# Altium PCB Emergency_v2.0.PcbDoc
Units mil, origin at the board's own origin, x right, y up, seen from the top; angles counter-clockwise.
Board outline 2363.93 x 3184.99 mil, 2 copper layers (Top Layer, Bottom Layer); 11 components, 9 nets, 38 pads, 355 vias.
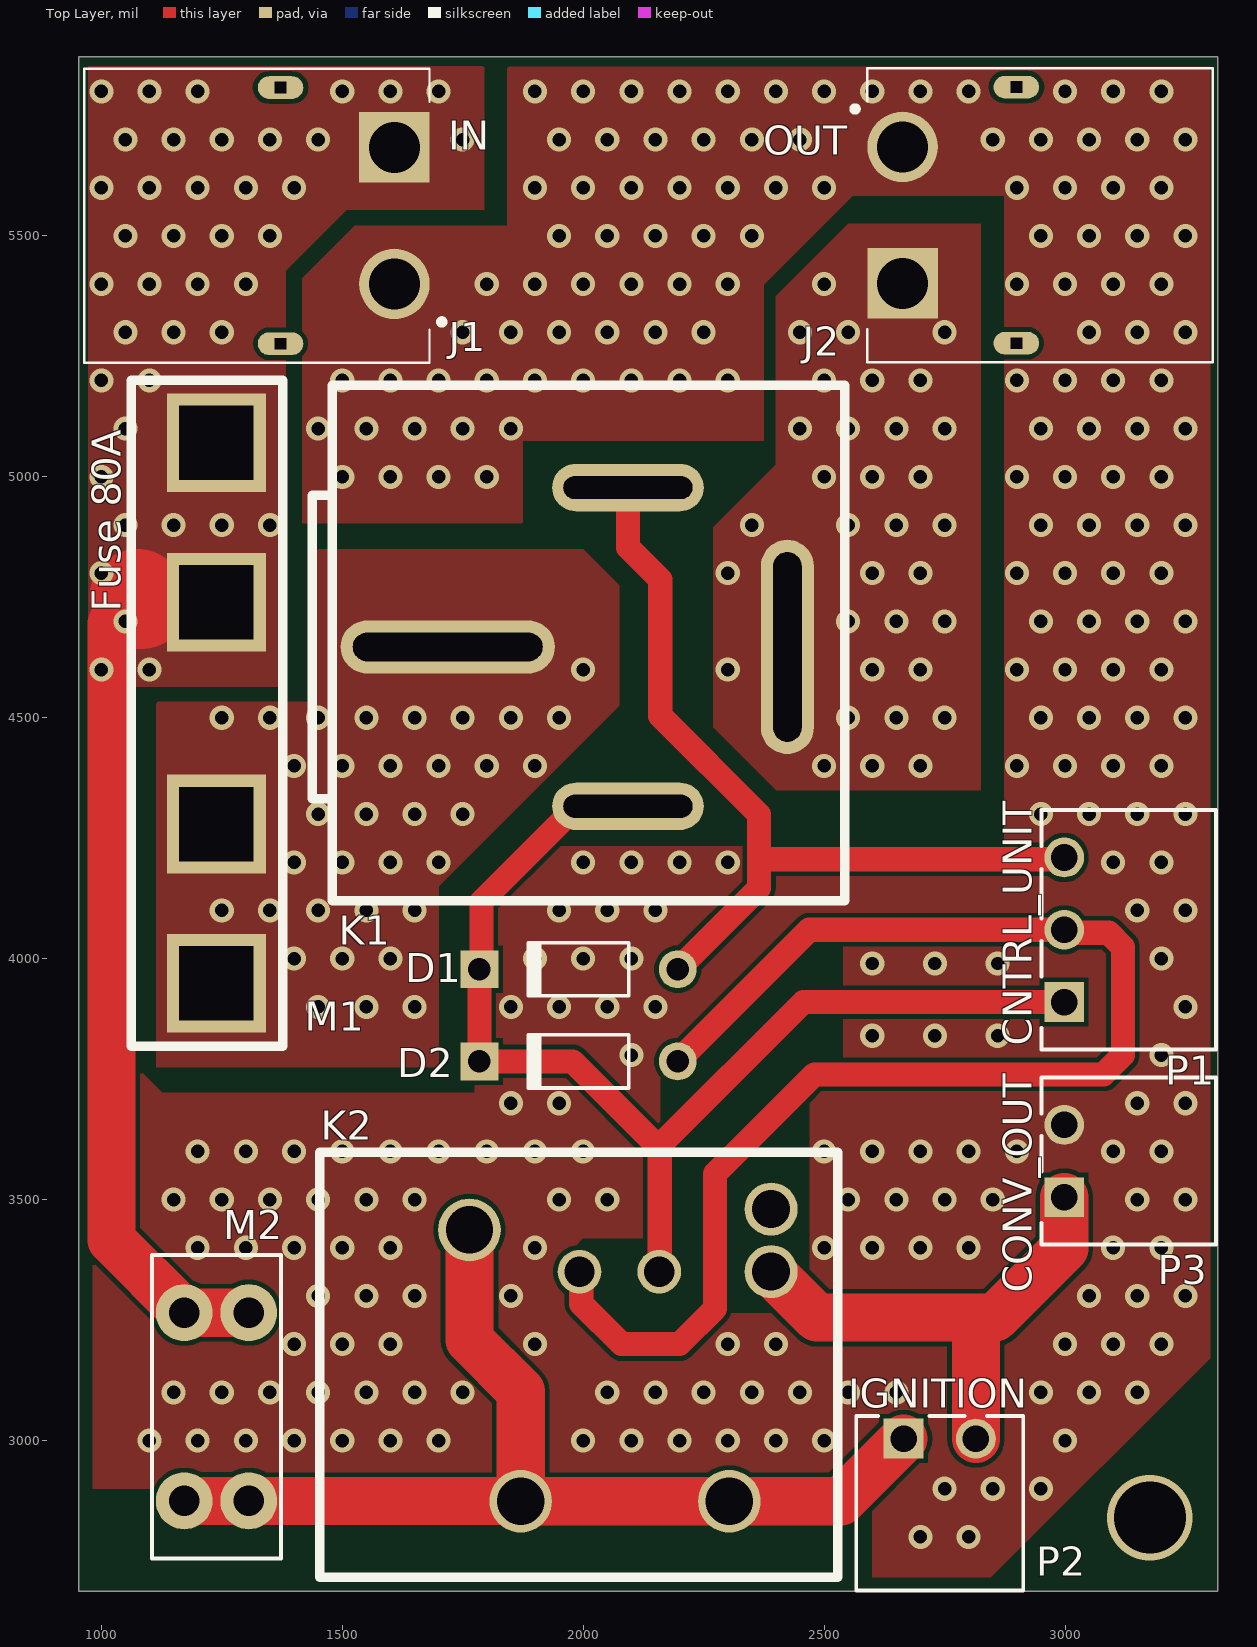
[diagram p0: Top Layer view]
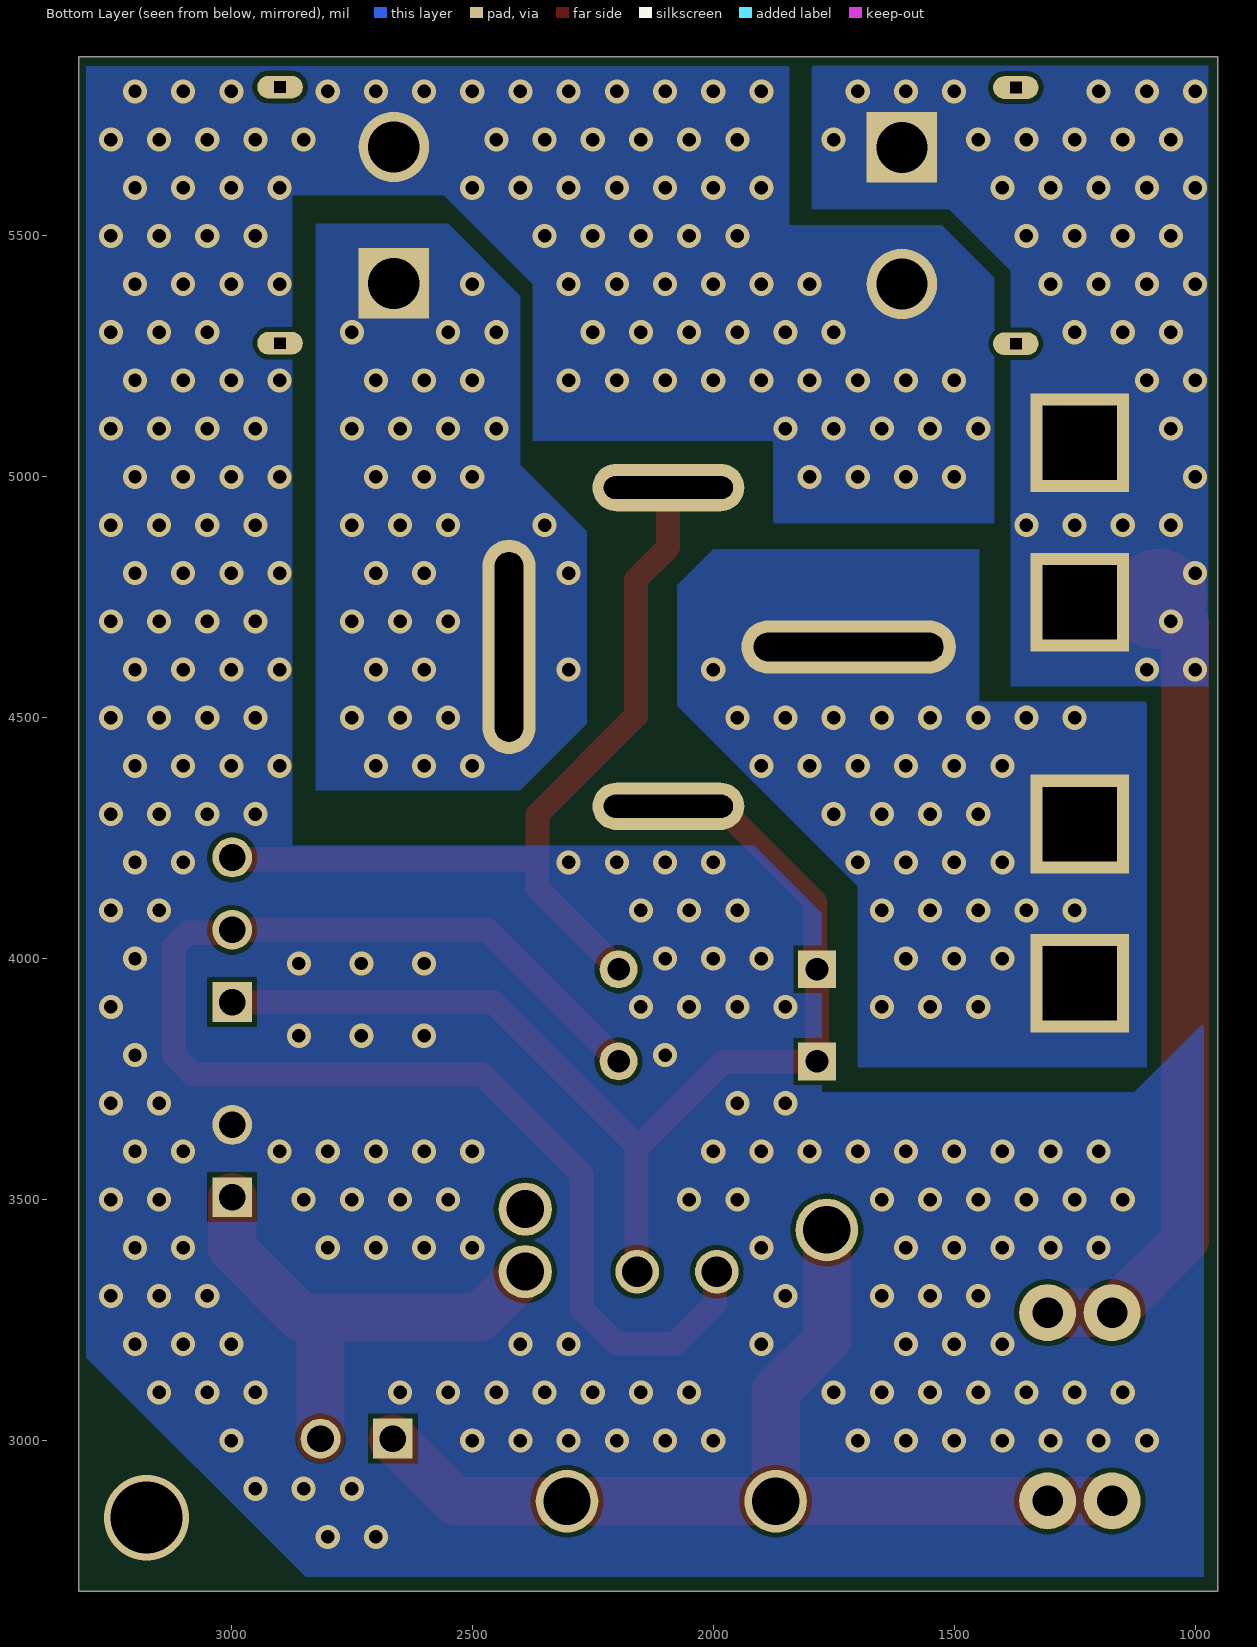
[diagram p1: Bottom Layer view, seen from below]

## Layer stack, top to bottom
Top Solder: solder mask 0.4, Solder Resist, Dk 3.5
Top Layer: signal copper 1.4
Dielectric 1: dielectric 12.6, FR-4, Dk 4.8
Bottom Layer: signal copper 1.4
Bottom Solder: solder mask 0.4, Solder Resist, Dk 3.5

## Board outline
953,2687.01 953,5872 3316.93,5872 3316.93,2687.01

## Design rules (kind name [scope] priority, off if disabled: settings)
Clearance "Stitching GND" [IsStitchingVia and InNet('GND') vs (IsVia and (Not IsStitchingVia)) Or IsPad] p1: gap=5 ignorepadtopadclearanceinfootprint=FALSE
Clearance [All] p2: gap=10 ignorepadtopadclearanceinfootprint=FALSE except(0: Arc-Hole Track-Hole SMDPad-Hole THPad-Hole Via-Hole Fill-Hole Poly-Hole Region-Hole Text-Hole)
HoleSize [All] p1: absolutevalues=TRUE maxlimit=1000 minlimit=1 maxpercent=80.000 minpercent=20.000
PolygonConnect [All] p1: connectstyle=Direct reliefconductorwidth=10 reliefentries=4 polygonreliefangle="90 Angle" airgapwidth=10
RoutingVias [All] p1: holewidth=28 width=50 viastyle="Through Hole" minholewidth=28 minwidth=50 maxholewidth=4000 maxwidth=5000
SolderMaskExpansion [All] p1: expansion=4 istentingtop=FALSE
Width [All] p1: maxlimit=5905.51 minlimit=10 preferedwidth=196.85
29 further rules are at their usual default settings.

## Components (designator, comment, footprint, x,y, rotation, side; value= is the part's Value field where it differs from the comment)
D1 "Diode 1N4001" DO-41 1990.37,3978.01 r180 top
D2 "Diode 1N4001" DO-41 1990.37,3787 r180 top
J1 "XT60PW-M" AMASS_XT60PW-M 1372,5542 r90 top
J2 "XT60PW-M" AMASS_XT60PW-M 2899,5543 r270 top
K1 "Relay" "RL800 12V 80A" 2502.46,4135.19 r90 top
K2 "Relay" "TRKP 12V 40A" 2527.87,2771.65 r0 top
M1 "FUSE HOLDER 80A_PCB" "FUSE HOLDER 80A PCB" 1239,3948.66 r90 top
M2 "FUSE HOLDER 5A" "KEYSTONE 3568" 1239,3070.04 r90 top
P1 "691322310003" 691322310003 3132.17,4060 r90 top
P2 "691322310002" 691322310002 2740,2870 r0 top
P3 "691322310002" 691322310002 3132.17,3580 r90 top

## Footprints (in the part's own frame and the unit in brackets; to place one, negate y for a bottom-side part, rotate by r counter-clockwise, add the part's x,y. Pads: shape width x height; smd on the part's side, far side on the other; paste and mask are expansions set on the pad)
691322310002 [mm] "Horizontal PCB Header, pitch 3.81mm, 02p"
  rect 2.1x2.1 hole 1.4: 1(-1.905,3.4)
  round 2.1 hole 1.4: 2(1.905,3.4)
  silkscreen extent -4.4,-4.6 4.41,4.6, body extent -4.4,-4.6 4.41,4.6, height 7.25
691322310003 [mm] "Horizontal PCB Header, pitch 3.81mm, 03p"
  rect 2.1x2.1 hole 1.4: 1(-3.81,3.4)
  round 2.1 hole 1.4: 2(0,3.4) 3(3.81,3.4)
  silkscreen extent -6.31,-4.6 6.31,4.6, body extent -6.31,-4.6 6.31,4.6, height 7.25
AMASS_XT60PW-M [mm]
  round 3.716 hole 2.7: 1(-3.6,-6)
  rect 3.716x3.716 hole 2.7: 2(3.6,-6)
  oval 1.2x2.4 hole 0.6 square: S1(-6.75,0) S2(6.75,0)
  silkscreen extent -7.75,-8.65 7.75,10.35, body extent -8,-7.93 8,10.47, height 8.5
DO-41 [mm] "Diode, Axial; Body 5.2 x 2.7 mm (LxDia. max), Lead Dia. 0.86 mm (max)"
  round 2 hole 1.2: 1(-5.23,0)
  rect 2x2 hole 1.2: 2(5.23,0)
  silkscreen extent -2.65,-1.4 2.75,1.4
"FUSE HOLDER 80A PCB" [mm]
  rect 5.2x5.2 hole 3.9 square: 1(0,0) 1(8.4,0) 2(20.1,0) 2(28.5,0)
  silkscreen extent -3.3,-3.5 31.8,4.5, body extent -0.81,-0.89 29.26,3.61, height 11
"KEYSTONE 3568" [mm] "MINI PC AUTO-FUSE HOLDER"
  round 3 hole 1.6: 1(-4.96,-1.7) 1(-4.96,1.7) 2(4.96,-1.7) 2(4.96,1.7)
  silkscreen extent -8,-3.4 8,3.4, body extent -8,-3.37 8,3.37, height 7.37
"RL800 12V 80A" [mm] "Mini Röle 12V 80A Güç Rölesi 4 Fişli ÜSTÜN RL800"
  oval 2.8x11.3 hole 10 slot 1.5 at 0 deg: 1(13,19.9)
  oval 11.3x2.8 hole 10 slot 1.5 at 90 deg: 2(13,2)
  oval 2.5x8 hole 6.8 slot 1.2 at 0 deg: 3(4.6,10.4) 4(21.4,10.4)
  silkscreen extent -0.38,-1.02 26.8,27.05, body extent 0.21,-0.55 26.21,25.45, height 22.8
"TRKP 12V 40A" [mm] "TRKP L-S-Z1/12VDC - RELAY 40A 12VDC FORMC"
  round 3.3 hole 2.5: 1(-19.4,16.9) 2(-16.7,2.6) 3(-5.7,2.6)
  round 2.8 hole 2: 4(-3.5,18) 5(-3.5,14.7)
  round 2.3 hole 1.6: 6(-9.4,14.7) 7(-13.6,14.7)
  silkscreen extent -27.3,-1.4 0,21, body extent -26.42,-0.76 -0.42,20.24, height 20.9

## Part data
D1 D2: "1 Amp General Purpose Rectifier", Code_JEDEC=DO-204-AL, ComponentLink1Description="Manufacturer Link", ComponentLink1URL=http://www.fairchildsemi.com/, ComponentLink2Description=Datasheet, ComponentLink2URL=http://www.fairchildsemi.com/ds/1N%2F1N4001.pdf, DatasheetVersion=1998, LatestRevisionDate=17-Jul-2002, LatestRevisionNote="Re-released for DXP Platform.", PackageDescription="Diode, Axial; Body 5.2 x 2.7 mm (LxDia. max), Lead Dia. 0.86 mm (max)", PackageReference=DO-41, PackageVersion=Aug-1999, Published=8-Jun-2000, Publisher="Altium Limited"
J1 J2: Package="Package Analog Devices", Availability=Unavailable, MF=AMASS, MP=XT60PW-M, Price=None, SnapEDA_Link=https://www.snapeda.com/parts/XT60PW-M%20/AMASS/view-part/3075559/?ref=snap
K1: library part "RL800 12V 80A", "Mini Röle 12V 80A Güç Rölesi 4 Fişli ÜSTÜN RL800", ComponentLink1Description="New link", ComponentLink1URL=https://urun.n11.com/role/mini-role-12v-80a-guc-rolesi-4-fisli-ustun-rl800-P368080847
K2: library part "TRKP 12V 40A", "TRKP L-S-Z1/12VDC - RELAY 40A 12VDC FORMC", ComponentLink1Description="New link", ComponentLink1URL=https://ozdisan.com/elektromekanik-komponentler/roleler-ve-role-soketleri/genel-tip-roleler/TRKP-L-S-Z112VDC
M1: "80A Automative Fuse Holder PCB Baglantisi", ComponentLink1Description="New link", ComponentLink1URL=http://www.farnell.com/datasheets/1703972.pdf
M2: "5A Automative Fuse Holder Keystone 3568"
P1: "WR-TBL Serie 322 Horizontal PCB Header, Pluggable, pitch 3.81mm, 3p", Operating Temperature="-40 to +105degC", Rated Current [UL]=10A, Working Voltage [UL]=300VAC, Application=Pluggable, Compliance=RoHS, ComponentLink1Description=Manufacturer, ComponentLink1URL=http://www.we-online.de, ComponentLink2Description=Datasheet, ComponentLink2URL=https://katalog.we-online.de/em/datasheet/691322310003.pdf, Modularity=No, Mounting Technology=THT, Packaging=Box, Part Number=691322310003, PCB/Cable/Panel=PCB, Pin Number=3, Pitch=3.81mm, Published Date="October 2019", Publisher="Wurth Elektronik", Type=Horizontal
P2 P3: "WR-TBL Serie 322 Horizontal PCB Header, Pluggable, pitch 3.81mm, 2p", Operating Temperature="-40 to +105degC", Rated Current [UL]=10A, Working Voltage [UL]=300VAC, Application=Pluggable, Compliance=RoHS, ComponentLink1Description=Manufacturer, ComponentLink1URL=http://www.we-online.de, ComponentLink2Description=Datasheet, ComponentLink2URL=https://katalog.we-online.de/em/datasheet/691322310002.pdf, Modularity=No, Mounting Technology=THT, Packaging=Box, Part Number=691322310002, PCB/Cable/Panel=PCB, Pin Number=2, Pitch=3.81mm, Published Date="October 2019", Publisher="Wurth Elektronik", Type=Horizontal

## Via types
v1: diameter 50, hole 28, Top Layer to Bottom Layer, 354 vias
v2: diameter 177.17, hole 149.61, Top Layer to Bottom Layer, 1 vias

## Nets (pads, with @x,y where several pads share a name; then routed paths per layer and width w, separated by ;. In a path a pad name is that pad's centre, name@x,y a point inside that pad or via, vN(x,y) a via of type N, cw(c..) or ccw(c..) an arc to the next point about the centre after c; other vN are vias at no path point)
+12: D1.2 D2.2 K1.3 K2.6 P1.1 | length 2393.7
  Top Layer w50: K1.3@2093.43,4314.96 1985.16,4314.96 1789,4118.8 1789,3982.54 D1.2 D2.2 1978,3787 2159,3606 ; K2.6 2159,3351.6 2159,3606 ; P1.1 2457,3910 2159,3612 2159,3606
GND: J1.1 J2.1 P3.2
  other v1: 2700,2800 2800,2800 2750,2900 2850,2900 2950,2900 1100,3000 1200,3000 1300,3000 1400,3000 1500,3000 1600,3000 1700,3000 2000,3000 2100,3000 2200,3000 2300,3000 2400,3000 2500,3000 3000,3000 1150,3100 1250,3100 1350,3100 1450,3100 1550,3100 1650,3100 1750,3100 2050,3100 2150,3100 2250,3100 2350,3100 2450,3100 2550,3100 2650,3100 2950,3100 3050,3100 3150,3100 1400,3200 1500,3200 1600,3200 1900,3200 2300,3200 2400,3200 3000,3200 3100,3200 3200,3200 1450,3300 1550,3300 1650,3300 1850,3300 3050,3300 3150,3300 3250,3300 1200,3400 1300,3400 1400,3400 1500,3400 1600,3400 1900,3400 2500,3400 2600,3400 2700,3400 2800,3400 3100,3400 3200,3400 1150,3500 1250,3500 1350,3500 1450,3500 1550,3500 1650,3500 1950,3500 2050,3500 2550,3500 2650,3500 2750,3500 2850,3500 3150,3500 3250,3500 1200,3600 1300,3600 1400,3600 1500,3600 1600,3600 1700,3600 1800,3600 1900,3600 2000,3600 2500,3600 2600,3600 2700,3600 2800,3600 2900,3600 3100,3600 3200,3600 1850,3700 1950,3700 3150,3700 3250,3700 2100,3800 3200,3800 2600,3840 2730,3840 2860,3840 1850,3900 1950,3900 2050,3900 2150,3900 3250,3900 2600,3990 2730,3990 2860,3990 1900,4000 2000,4000 2100,4000 3200,4000 1950,4100 2050,4100 2150,4100 3150,4100 3250,4100 2000,4200 2100,4200 2200,4200 2300,4200 3100,4200 3200,4200 2950,4300 3050,4300 3150,4300 3250,4300 2900,4400 3000,4400 3100,4400 3200,4400 2950,4500 3050,4500 3150,4500 3250,4500 2900,4600 3000,4600 3100,4600 3200,4600 2950,4700 3050,4700 3150,4700 3250,4700 2900,4800 3000,4800 3100,4800 3200,4800 2950,4900 3050,4900 3150,4900 3250,4900 1500,5000 1600,5000 1700,5000 1800,5000 2900,5000 3000,5000 3100,5000 3200,5000 1450,5100 1550,5100 1650,5100 1750,5100 1850,5100 2950,5100 3050,5100 3150,5100 3250,5100 1500,5200 1600,5200 1700,5200 1800,5200 1900,5200 2000,5200 2100,5200 2200,5200 2300,5200 2900,5200 3000,5200 3100,5200 3200,5200 1750,5300 1850,5300 1950,5300 2050,5300 2150,5300 2250,5300 3050,5300 3150,5300 3250,5300 1800,5400 1900,5400 2000,5400 2100,5400 2200,5400 2300,5400 2900,5400 3000,5400 3100,5400 3200,5400 1950,5500 2050,5500 2150,5500 2250,5500 2350,5500 2950,5500 3050,5500 3150,5500 3250,5500 1900,5600 2000,5600 2100,5600 2200,5600 2300,5600 2400,5600 2500,5600 2900,5600 3000,5600 3100,5600 3200,5600 1950,5700 2050,5700 2150,5700 2250,5700 2350,5700 2450,5700 2850,5700 2950,5700 3050,5700 3150,5700 3250,5700 1900,5800 2000,5800 2100,5800 2200,5800 2300,5800 2400,5800 2500,5800 2600,5800 2700,5800 2800,5800 3000,5800 3100,5800 3200,5800
NetD1_1: D1.1 K1.4 P1.3 | length 1803.7
  Top Layer w50: K1.4@2093.43,4976.38 2093.43,4853.57 2160,4787 2160,4504 2365,4299 2365,4206.32 ; D1.1 2196.75,3978.01 2365,4146.26 2365,4206.32 ; P1.3@2986.14,4210 2982.46,4206.32 2365,4206.32
NetD2_1: D2.1 K2.7 P1.2 | length 2915.2
  Top Layer w50: K2.7 1996.07,3346.76 1996.07,3283.93 2080,3200 2200,3200 2273.63,3273.63 2273.63,3553.63 2480,3760 3080,3760 3120,3800 3120,4024.46 3090.71,4053.75 3004.57,4053.75 P1.2 2469.28,4060 D2.1
NetJ2_2: J2.2 K1.2
  other v1: 2500,4400 2600,4400 2700,4400 2550,4500 2650,4500 2750,4500 2300,4600 2600,4600 2700,4600 2550,4700 2650,4700 2750,4700 2300,4800 2600,4800 2700,4800 2350,4900 2550,4900 2650,4900 2750,4900 2500,5000 2600,5000 2700,5000 2450,5100 2550,5100 2650,5100 2750,5100 2500,5200 2600,5200 2700,5200 2450,5300 2550,5300 2750,5300 2500,5400
NetK1_1: K1.1 M1.1
  other v1: 1450,3900 1550,3900 1650,3900 1400,4000 1500,4000 1600,4000 1250,4100 1350,4100 1450,4100 1550,4100 1650,4100 1400,4200 1500,4200 1600,4200 1700,4200 1450,4300 1550,4300 1650,4300 1750,4300 1400,4400 1500,4400 1600,4400 1700,4400 1800,4400 1900,4400 1250,4500 1350,4500 1450,4500 1550,4500 1650,4500 1750,4500 1850,4500 1950,4500 2000,4600
NetK2_1: K2.1 K2.2 K2.3 M2.1 P2.1 | length 2158.1
  Top Layer w100: M2.1@1172.07,2874.77 1305.93,2874.77 1306.3,2874.39 1870.02,2874.39 K2.2 ; M2.1@1316.93,2879.72 M2.1@1319.78,2876.87 ; K2.1 1764.09,3208.66 1870.39,3102.36 K2.2 ; P2.1 2535.16,2874.02 K2.3 K2.2
NetK2_5: K2.5 P2.2 P3.1 | length 1067
  Top Layer w100: K2.5 2485.47,3255 2810,3255 ; P2.2 2815,3250 2810,3255 ; P3.1 2998.31,3398.31 2855,3255 2810,3255
VCC: J1.2 M1.2 M2.2 | length 1874.2
  Top Layer w100: M1.2@1239,4740 1065,4740 1020.93,4695.93 1020.93,3416.45 1172.07,3265.32 M2.2@1305.93,3265.32
  Top Layer w200: 1075,4750 1082.64,4742.36
  other v1: 1000,4600 1100,4600 1050,4700 1000,4800 1050,4900 1150,4900 1250,4900 1350,4900 1000,5000 1050,5100 1000,5200 1100,5200 1050,5300 1150,5300 1250,5300 1000,5400 1100,5400 1200,5400 1300,5400 1050,5500 1150,5500 1250,5500 1350,5500 1000,5600 1100,5600 1200,5600 1300,5600 1400,5600 1050,5700 1150,5700 1250,5700 1350,5700 1450,5700 1750,5700 1000,5800 1100,5800 1200,5800 1500,5800 1600,5800 1700,5800
pads on no net: J1.S1 J1.S2 J2.S1 J2.S2 K2.4
copper on no net:
  other v2: 3176,2840

## Polygon pours and split planes (outlines as drawn)
GND on Top Layer "GND_L01_P008" (solid, pour order 8): 1417.3,5412.15 1417.3,4903.15 1872.3,4903.15 2043.3,5074.15 2375.3,5074.15 2375.3,5399.15 2559.3,5583.15 2874.3,5583.15 2874.3,4292.15 2874.3,4233.15 1915.3,4233.15 1775.3,4093.15 1775.3,3722.15 1126.3,3722.15 982.3,3866.15 982.3,2716.15 2846.3,2716.15 3301.3,3171.15 3301.3,5851.15 1842.3,5851.15 1842.3,5840.15 1842.3,5841.15 1842.3,5521.15 1526.3,5521.15
VCC on Top Layer "VCC_L01_P001" (solid, pour order 1): 972.67,4567.84 972.67,4564.57 972.67,4567.84 972.67,4564.57 972.67,4572.57 972.67,5852.57 1791.67,5852.57 1794.67,5849.57 1794.67,5554.57 1509.67,5554.57 1382.67,5427.57 1382.67,4564.57 972.67,4564.57
NetK1_1 on Top Layer "NETK1_1_L01_P004" (solid, pour order 4): 1113.7,4532.89 1447.57,4532.83 1447.57,4847.57 1450,4850 2000,4850 2075,4775 2075,4525 1700,4150 1700,3775 1113.7,3775
NetJ2_2 on Top Layer "NETJ2_2_L01_P005" (solid, pour order 5): 2825,5525 2825,4350 2824.03,4349.03 2400.97,4349.03 2262.2,4487.8 2262.2,4892.18 2267.18,4892.18 2400,5025 2400,5375 2550,5525
GND on Bottom Layer "GND_L02_P007" (solid, pour order 7): 1417,5413 1417,4904 1872,4904 2043,5075 2375,5075 2375,5400 2559,5584 2874,5584 2874,4293 2874,4234 1915,4234 1775,4094 1775,3723 1126,3723 982,3867 982,2717 2846,2717 3301,3172 3301,5852 1842,5852 1842,5841 1842,5842 1842,5522 1526,5522
NetK1_1 on Bottom Layer "NETK1_1_L02_P002" (solid, pour order 2): 1100,4532.9 1447.57,4532.83 1447.57,4847.57 1450,4850 2000,4850 2075,4775 2075,4525 1700,4150 1700,3775 1100,3775
VCC on Bottom Layer "VCC_L02_P000" (solid, pour order 0): 973,4568.27 973,4565 973,4568.27 973,4565 973,4573 973,5853 1792,5853 1795,5850 1795,5555 1510,5555 1383,5428 1383,4565 973,4565
NetJ2_2 on Bottom Layer "NETJ2_2_L02_P006" (solid, pour order 6): 2825,5525 2825,4350 2824.03,4349.03 2400.97,4349.03 2262.2,4487.8 2262.2,4887.2 2400,5025 2400,5375 2550,5525

## Other copper
Top Layer:
  pour cut-out: 978,2900 1900,2900 2600,2900 2600,2700 978,2700
  pour cut-out: 1985.16,3405.67 1999.49,3420 2160,3420 2160,3200 2080,3200 2080,3220 1985.16,3314.84
  pour cut-out: 2460,4069.19 2160,3786.91 2160,3200 2286.55,3280 2286.55,3533.45 2540,3786.91 2540,3880 2540,4040
  pour cut-out: 2270,4914.98 2270,4477 2500,4247 2500,4220 2360,4220 2320,4260 2140,4260 2140,4320 2140,4500 2140,4767 2160,4787 2093.43,4853.57 2093.43,4914.98 2094.98,4914.98 2215,4914.98
  pour cut-out: 2262,4893.15 2375,5025 2375,5075 1875,5075 1875,4860 2262,4860
  pour cut-out: 2308.93,3539 2307.72,3537.8 2307.72,3264.49 2464.49,3264.49 2470,3270 2470,3700 2309,3539
Bottom Layer:
  pour cut-out: 2235.38,4854 1875,4854 1875,5075 2375,5075 2375,5040.95

## Silkscreen, mask and mechanical layers (free items; w line width, h text height)
Top Overlay:
  text "IN" at 1720,5679 h60
  text "OUT" at 2374,5668 h60
  text "Fuse 80A" at 1040,4720 h60 r90
  text "CNTRL_UNIT" at 2931,3819 h60 r90
  text "CONV_OUT" at 2931.51,3307.15 h60 r90
  text "IGNITION" at 2549.76,3068.08 h60
Mechanical 1:
  lines w19.68: 3308.96,2687.01 953,2687.01 953,5872 3316.93,5872 3316.93,2687.01